# Altium PCB PCB1.PcbDoc
Units mil, origin at the board's own origin, x right, y up, seen from the top; angles counter-clockwise.
Board outline 2000 x 2000 mil, 2 copper layers (Top Layer, Bottom Layer); 67 components, 80 nets, 316 pads, 83 vias.
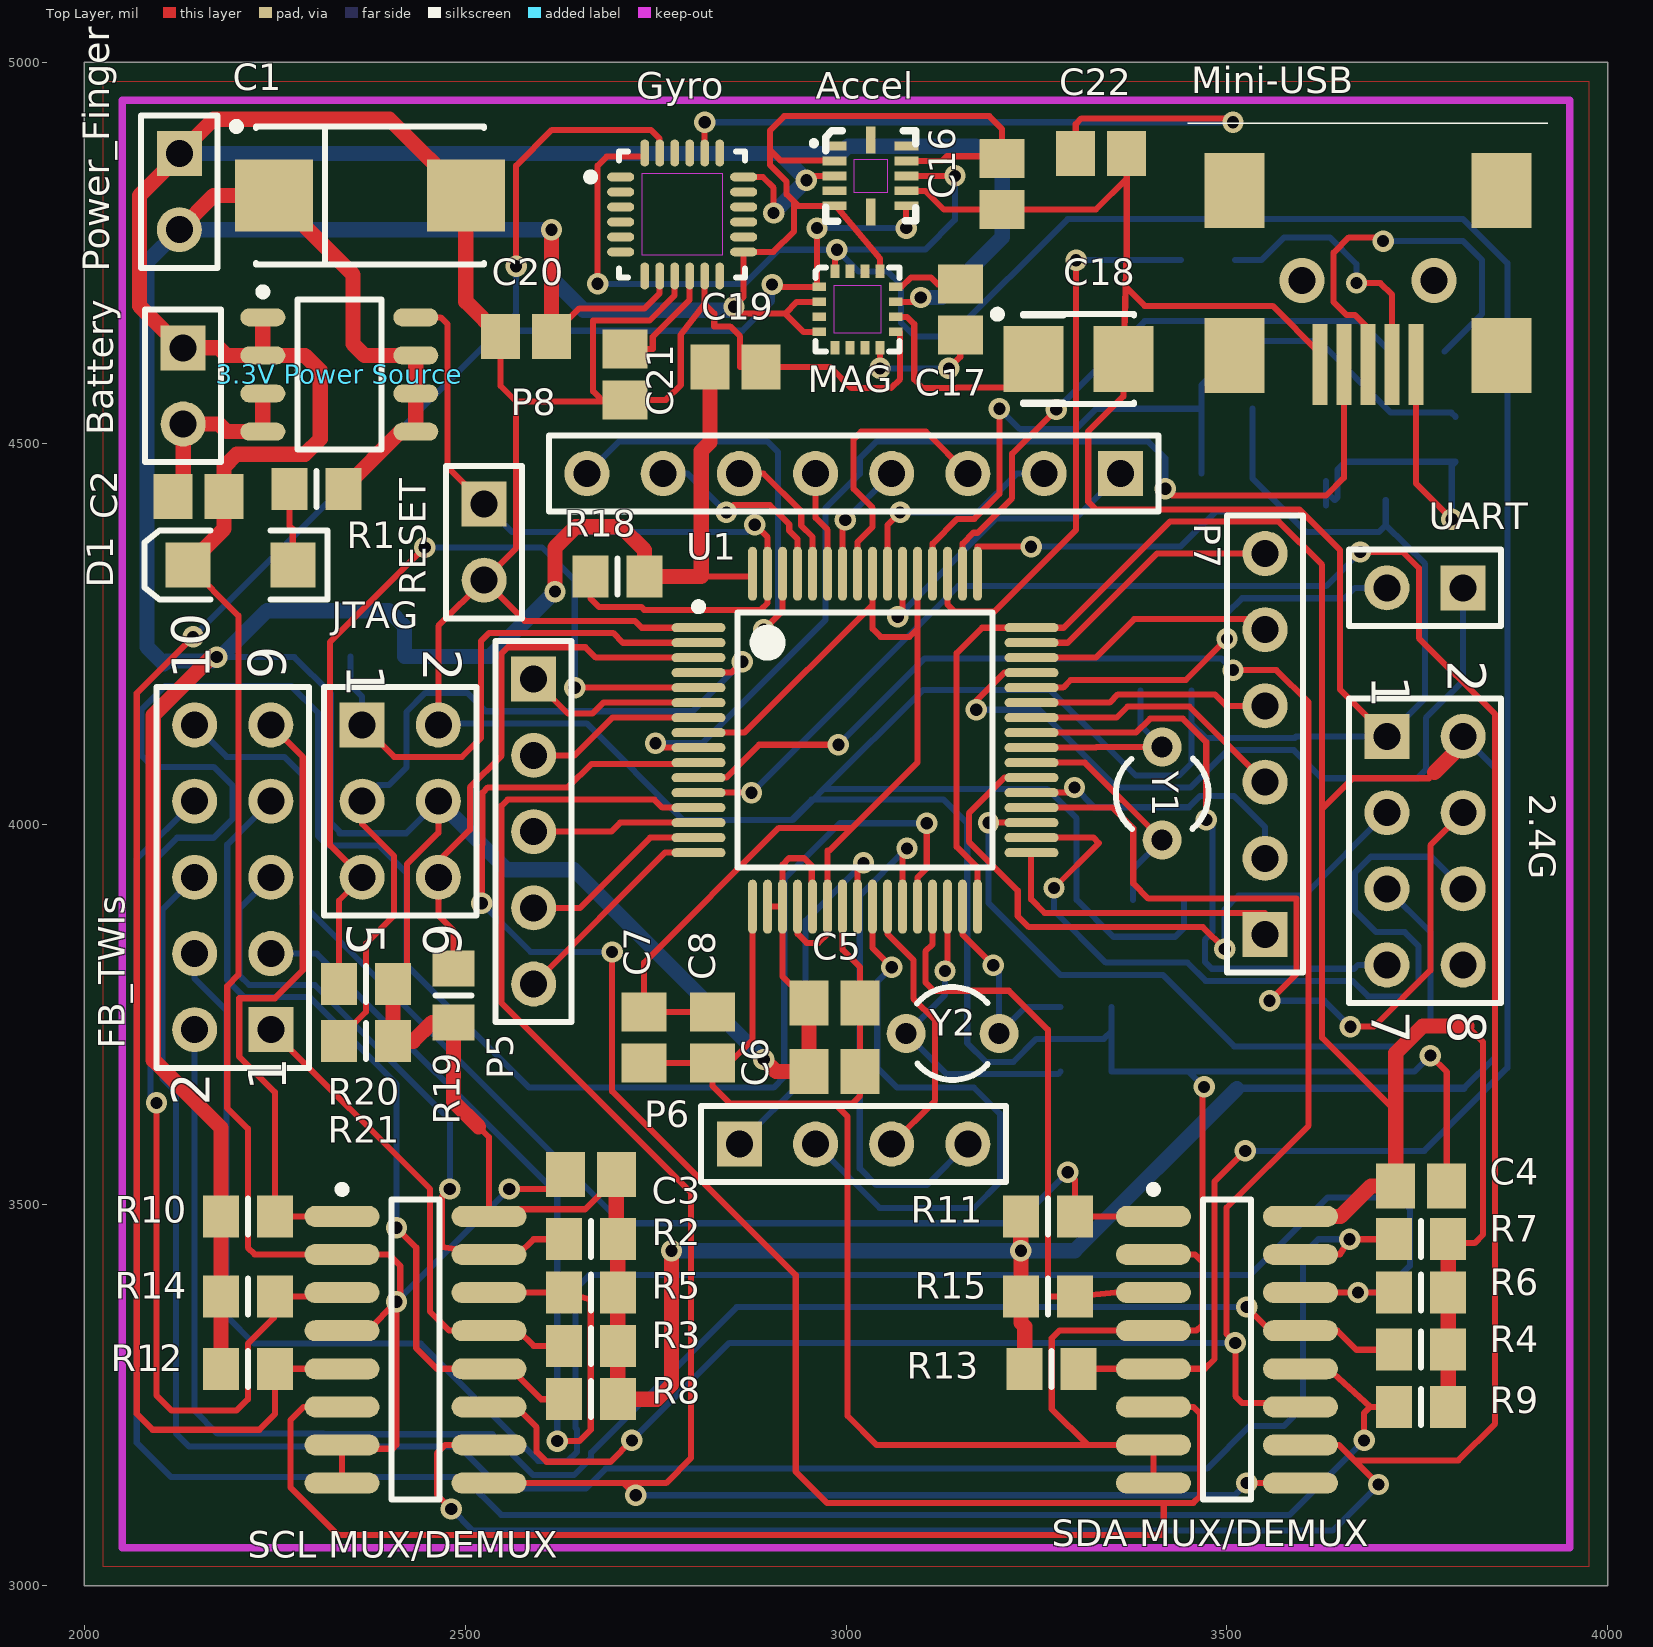
[diagram p0: Top Layer view]
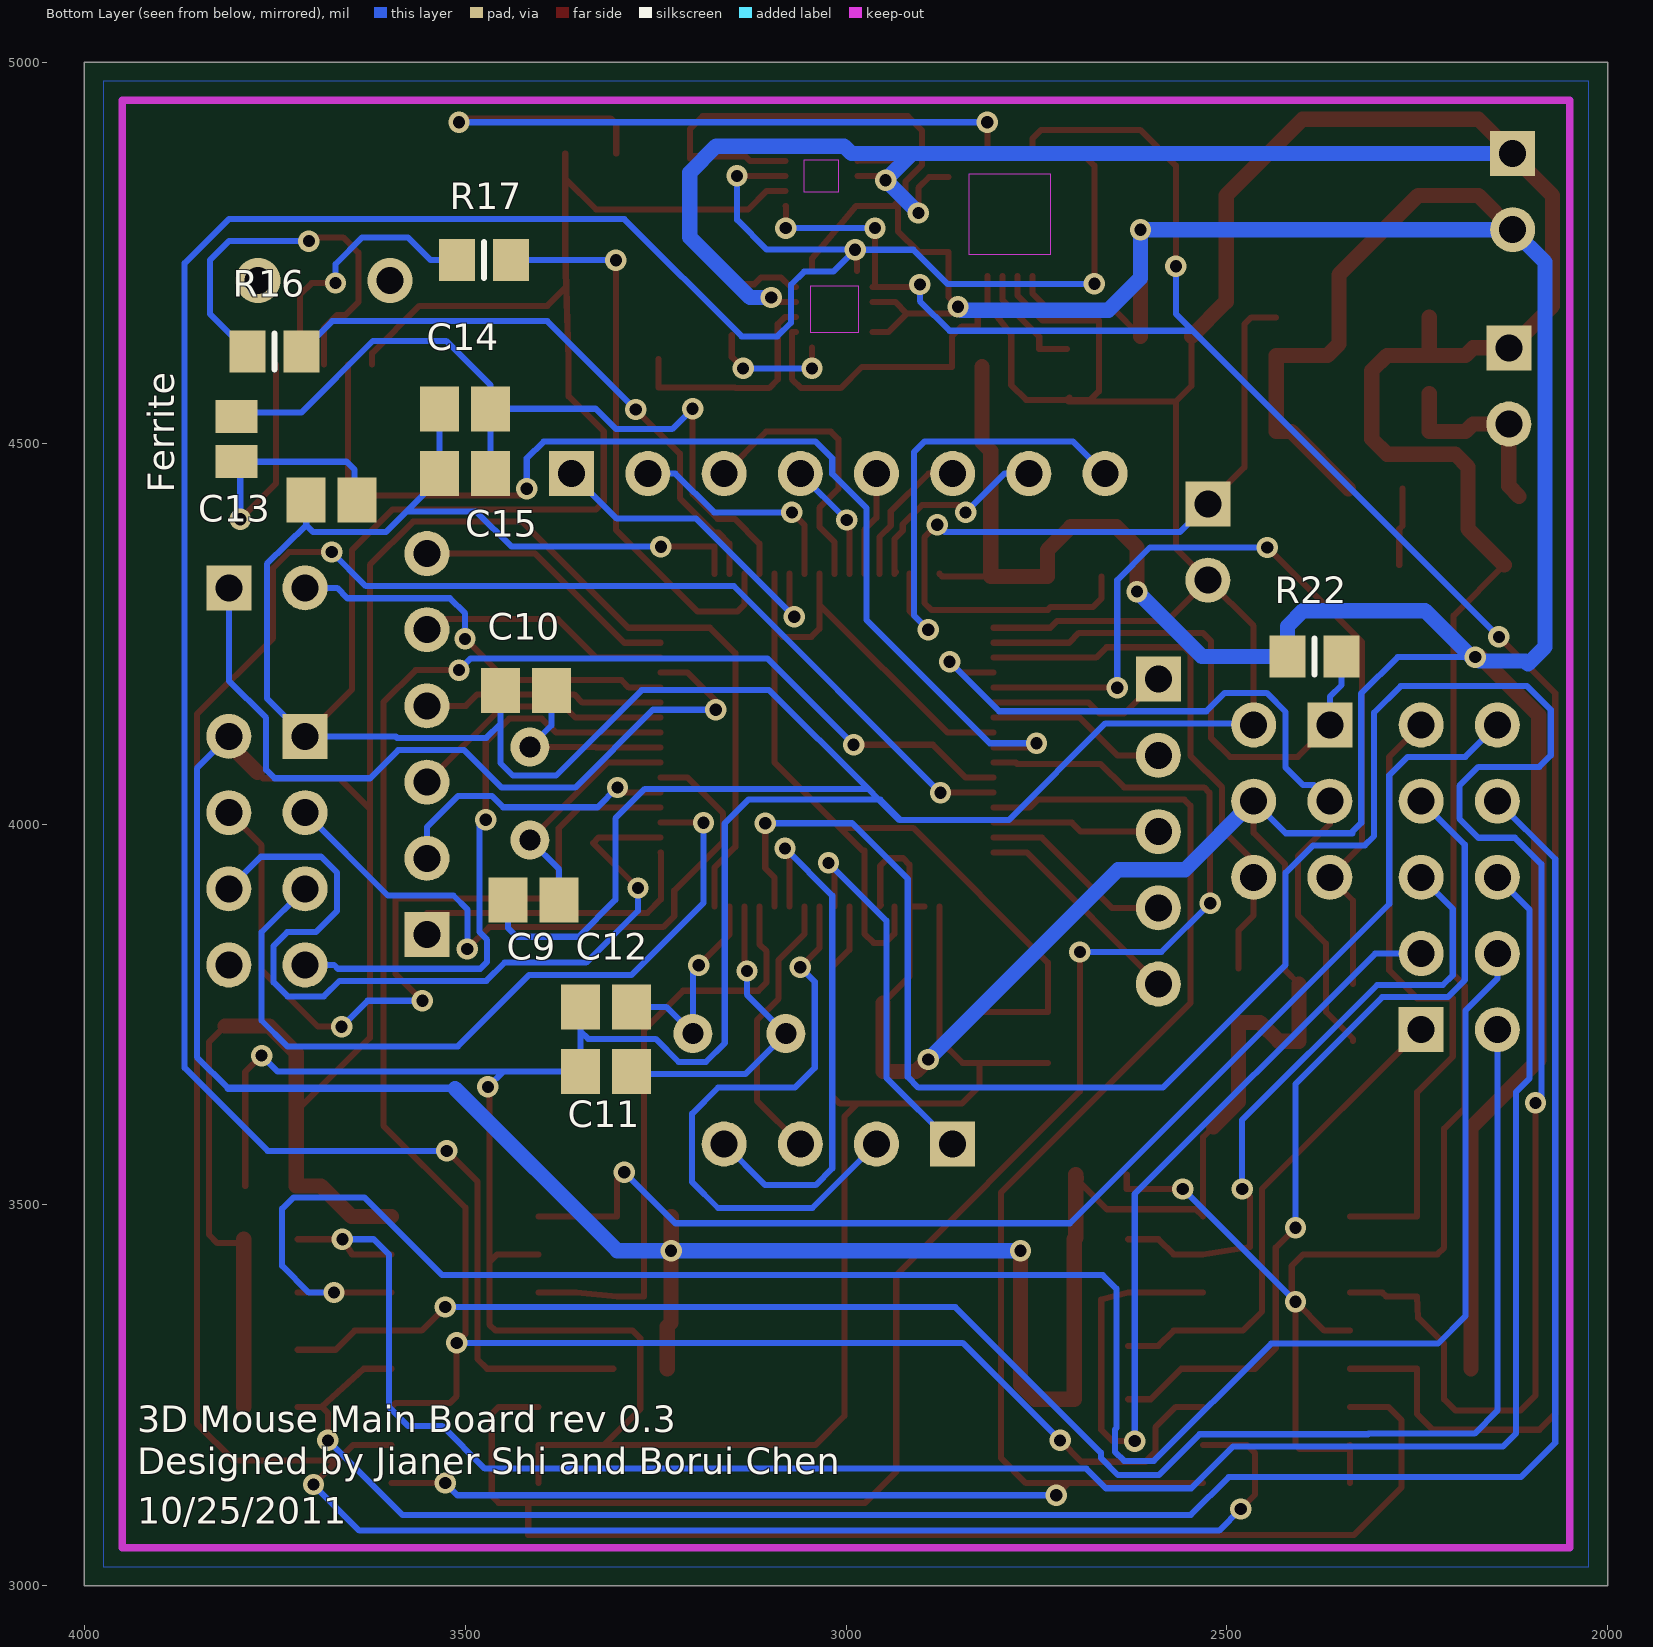
[diagram p1: Bottom Layer view, seen from below]

## Layer stack, top to bottom
Top Layer: signal copper 1.4
Dielectric: dielectric 12.6, FR-4, Dk 4.8
Bottom Layer: signal copper 1.4

## Board outline
2000,3000 4000,3000 4000,5000 2000,5000

## Design rules (kind name [scope] priority, off if disabled: settings)
Clearance "Polygon Spacing" [InPolygon] p1: gap=30
Clearance [All] p2: gap=7.8
HoleSize [All] p1: absolutevalues=TRUE maxlimit=100 minlimit=16 maxpercent=80.000 minpercent=20.000
MinimumAnnularRing [All] p1: minimumring=6
PlaneClearance [All] p1: clearance=8
PolygonConnect [All] p1: connectstyle=Relief reliefconductorwidth=10 reliefentries=4 polygonreliefangle="90 Angle"
RoutingVias [All] p1: holewidth=16 width=28 viastyle="Through Hole" minholewidth=16 minwidth=27 maxholewidth=16 maxwidth=35
SilkscreenOverComponentPads [All] p1: minsilkscreentomaskgap=10
SolderMaskExpansion [All] p1: expansion=8
Width [All] p1: maxlimit=50 minlimit=8 preferedwidth=8
25 further rules are at their usual default settings.

## Classes and differential pairs
net class TWI[1..0]: TWI0 TWI1
net class PB[11..0]: PB0 PB1 PB2 PB3 PB4 PB5 PB6 PB7 PB8 PB9 PB10 PB11
net class PA[31..0]: PA0 PA1 PA2 PA3 PA4 PA8 PA9 PA10 PA11 PA12 PA13 PA14 PA15 PA16 PA17 PA18 PA19 PA20 PA21 PA22 PA23 PA24 PA25 PA26 PA27 PA28 PA29 PA30 PA31
net class INT5_[2..0]: INT5_0 INT5_1 INT5_2
net class BUS_SEL[2..0]: BUS_SEL0 BUS_SEL1 BUS_SEL2
net class AUX_TWI[1..0]: AUX_TWI0 AUX_TWI1
component class "U_Main Board": 2.4G C5 C6 C7 C8 C9 C10 C11 C12 C13 C14 C15 Ferrite JTAG Mini-USB R14 R15 R16 R17 R18 R19 R20 R21 R22 RESET U1 UART Y1 Y2
component class U_IMU3000: C19 C20 C21 C22 Gyro
component class U_I2C_BUS_MUX: C3 C4 FB_TWIs R2 R3 R4 R5 R6 R7 R8 R9 R10 R11 R12 R13 "SCL MUX/DEMUX" "SDA MUX/DEMUX"
component class U_HMC5883L: C17 C18 MAG
component class U_BMA180: Accel C16
component class U_3: "3.3V Power Source" Battery C1 C2 D1 R1
component class 3DMouseMainBoardAssembly: P5 P6 P7 P8 Power_Finger

## Components (designator, comment, footprint, x,y, rotation, side; value= is the part's Value field where it differs from the comment)
2.4G "Header 4X2" HDR2X4 3710,4115 r270 top
"3.3V Power Source" "TPS7333Q" SOIC127P600-8BL 2335,4590 r0 top
Accel "BMA180" "BMA180 - ECESHOP" 2985,4890 r0 top
Battery "Header 2" HDR1X2 2130,4625 r270 top
C1 "Cap Pol1" TC7343-2917 2375,4825 r0 top
C2 "Cap Semi" CAPC2012N 2150,4430 r180 top
C3 "Cap Semi" CAPC2012N 2665,3540 r0 top
C4 "Cap Semi" CAPC2012N 3755,3525 r180 top
C5 "Cap Semi" CAPC2012N 2985,3765 r180 top
C6 "Cap Semi" CAPC2012N 2985,3675 r180 top
C7 "Cap Semi" CAPC2012N 2735,3720 r90 top
C8 "Cap Semi" CAPC2012N 2825,3720 r90 top
C9 "Cap Semi" CAPC2012N 3410,3900 r180 bottom
C10 "Cap Semi" CAPC2012N 3420,4175 r180 bottom
C11 "Cap Semi" CAPC2012N 3315,3675 r180 bottom
C12 "Cap Semi" CAPC2012N 3315,3760 r180 bottom
C13 "Cap Semi" CAPC2012N 3675,4425 r0 bottom
C14 "Cap Semi" CAPC2012N 3500,4545 r0 bottom
C15 "Cap Semi" CAPC2012N 3500,4460 r0 bottom
C16 "Cap Semi" CAPC2012N 3205,4840 r90 top
C17 "Cap Semi" CAPC2012N 3150,4675 r90 top
C18 "Cap Pol1" TC3528-1411 3305,4610 r0 top
C19 "Cap Semi" CAPC2012N 2855,4600 r180 top
C20 "Cap Semi" CAPC2012N 2580,4640 r0 top
C21 "Cap Semi" CAPC2012N 2710,4590 r90 top
C22 "Cap Semi" CAPC2012N 3335,4880 r180 top
D1 "LED2" 3.2X1.6X1.1 2205,4340 r180 top
FB_TWIs "Header 5X2" HDR2X5 2245,3730 r90 top
Ferrite "Ferrite Bead 1A" C0805 3800,4505 r90 bottom
Gyro "IMU3000" IMU3000_ECESHOP 2785,4800 r0 top
JTAG "Header 3X2" HDR2X3 2365,4130 r270 top
MAG "HMC5883L" "HMC5883L - ECESHOP" 2965,4705 r0 top
Mini-USB "Mini USB" "MINI USB" 3685,4920 r270 top
P5 "Header 5" HDR1X5 2590,4190 r270 top
P6 "Header 4" HDR1X4 2860,3580 r0 top
P7 "Header 8" HDR1X6 3550,3855 r90 top
P8 "Header 7" HDR1X8 3360,4460 r180 top
Power_Finger "Header 2" HDR1X2 2125,4880 r270 top
R1 "Res3" RESC2012N 2305,4440 r180 top
R2 "Res3" RESC2012N 2665,3455 r180 top
R3 "Res3" RESC2012N 2665,3315 r180 top
R4 "Res3" RESC2012N 3755,3310 r180 top
R5 "Res3" RESC2012N 2665,3385 r180 top
R6 "Res3" RESC2012N 3755,3385 r180 top
R7 "Res3" RESC2012N 3755,3455 r180 top
R8 "Res3" RESC2012N 2665,3245 r180 top
R9 "Res3" RESC2012N 3755,3235 r180 top
R10 "Res3" RESC2012N 2215,3485 r0 top
R11 "Res3" RESC2012N 3265,3485 r0 top
R12 "Res3" RESC2012N 2215,3285 r0 top
R13 "Res3" RESC2012N 3270,3285 r0 top
R14 "Res3" RESC2012N 2215,3380 r180 top
R15 "Res3" RESC2012N 3265,3380 r180 top
R16 "Res3" RESC2012N 3750,4620 r180 bottom
R17 "Res3" RESC2012N 3475,4740 r180 bottom
R18 "Res3" RESC2012N 2700,4325 r180 top
R19 "Res3" RESC2012N 2485,3775 r90 top
R20 "Res3" RESC2012N 2370,3790 r180 top
R21 "Res3" RESC2012N 2370,3715 r180 top
R22 "Res3" RESC2012N 2385,4220 r180 bottom
RESET "Header 2" HDR1X2 2525,4420 r270 top
"SCL MUX/DEMUX" "74LV4051" SOIC16_M 2435,3310 r0 top
"SDA MUX/DEMUX" "74LV4051" SOIC16_M 3500,3310 r0 top
U1 "AT32UC3B0256-A2UT" TQFP64_N 3025,4110 r0 top
UART "Header 2" HDR1X2 3810,4310 r180 top
Y1 "XTAL 16Mhz" R38 3415,4040 r0 top
Y2 "XTAL 32.768khz" R38 3140,3725 r270 top

## Footprints (in the part's own frame and the unit in brackets; to place one, negate y for a bottom-side part, rotate by r counter-clockwise, add the part's x,y. Pads: shape width x height; smd on the part's side, far side on the other; paste and mask are expansions set on the pad)
3.2X1.6X1.1 [mm] "SMT LED; 2 Flat Leads"
  rect 1.5x1.5 smd: 1(-1.75,0) 2(1.75,0)
  silkscreen extent -2.9,-1.15 3.2,1.15
"BMA180 - ECESHOP" [mm] "BMA180 - ECESHOP"
  rect 0.8x0.29 smd: 1(0,0) 2(0,-0.5) 3(0,-1) 4(0,-1.5) 5(0,-2) 7(2.4,-2) 8(2.4,-1.5) 9(2.4,-1) 10(2.4,-0.5) 11(2.4,0)
  rect 0.32x0.9 smd: 6(1.2,-2.2) 12(1.2,0.2)
  Keep-Out Layer region: 0.633,-1.54 1.773,-1.54 1.773,-0.462 0.633,-0.462
  silkscreen extent -0.73,-2.51 2.7,0.5, body extent -0.3,-2.5 2.7,0.5, height 0.9
C0805 [mm] "Chip Capacitor, Body 2.0x1.3mm, IPC High Density"
  rect 1.1x1.4 smd: 1(-0.75,0) 2(0.75,0)
  body extent -1.1,-0.72 1.1,0.72, height 1.4
CAPC2012N [mm] "Chip Capacitor, Body 2.0x1.3mm, IPC Medium Density"
  rect 1.3x1.5 smd: 1(-0.85,0) 2(0.85,0)
  body extent -1.1,-0.72 1.1,0.72, height 1.1
HDR1X2 [mm] "Connector; Header; 2 Position"
  rect 1.5x1.5 hole 0.9: 1(0,0)
  round 1.5 hole 0.9: 2(2.54,0)
  silkscreen extent -1.27,-1.27 3.81,1.27
HDR1X4 [mm] "Connector; Header; 4 Position"
  rect 1.5x1.5 hole 0.9: 1(0,0)
  round 1.5 hole 0.9: 2(2.54,0) 3(5.08,0) 4(7.62,0)
  silkscreen extent -1.27,-1.27 8.89,1.27
HDR1X5 [mm] "Connector; Header; 5 Position"
  rect 1.5x1.5 hole 0.9: 1(0,0)
  round 1.5 hole 0.9: 2(2.54,0) 3(5.08,0) 4(7.62,0) 5(10.16,0)
  silkscreen extent -1.27,-1.27 11.43,1.27
HDR1X6 [mm] "Connector; Header; 6 Position"
  rect 1.5x1.5 hole 0.9: 1(0,0)
  round 1.5 hole 0.9: 2(2.54,0) 3(5.08,0) 4(7.62,0) 5(10.16,0) 6(12.7,0)
  silkscreen extent -1.27,-1.27 13.97,1.27
HDR1X8 [mm] "Connector; Header; 8 Position"
  rect 1.5x1.5 hole 0.9: 1(0,0)
  round 1.5 hole 0.9: 2(2.54,0) 3(5.08,0) 4(7.62,0) 5(10.16,0) 6(12.7,0) 7(15.24,0) 8(17.78,0)
  silkscreen extent -1.27,-1.27 19.05,1.27
HDR2X3 [mm] "Connector; Header; 3x2 Position"
  rect 1.5x1.5 hole 0.9: 1(0,0)
  round 1.5 hole 0.9: 2(0,2.54) 3(2.54,0) 4(2.54,2.54) 5(5.08,0) 6(5.08,2.54)
  silkscreen extent -1.27,-1.27 6.35,3.81
HDR2X4 [mm] "Connector; Header; 4x2 Position"
  rect 1.5x1.5 hole 0.9: 1(0,0)
  round 1.5 hole 0.9: 2(0,2.54) 3(2.54,0) 4(2.54,2.54) 5(5.08,0) 6(5.08,2.54) 7(7.62,0) 8(7.62,2.54)
  silkscreen extent -1.27,-1.27 8.89,3.81
HDR2X5 [mm] "Connector; Header; 5x2 Position"
  rect 1.5x1.5 hole 0.9: 1(0,0)
  round 1.5 hole 0.9: 2(0,2.54) 3(2.54,0) 4(2.54,2.54) 5(5.08,0) 6(5.08,2.54) 7(7.62,0) 8(7.62,2.54) 9(10.16,0) 10(10.16,2.54)
  silkscreen extent -1.27,-1.27 11.43,3.81
"HMC5883L - ECESHOP" [mm]
  rect 0.45x0.29 smd: 1(0,0) 2(0,-0.5) 3(0,-1) 4(0,-1.5) 9(2.55,-1.5) 10(2.55,-1) 11(2.55,-0.5) 12(2.55,0)
  rect 0.29x0.45 smd: 5(0.525,-2.025) 6(1.025,-2.025) 7(1.525,-2.025) 8(2.025,-2.025) 13(2.025,0.525) 14(1.525,0.525) 15(1.025,0.525) 16(0.525,0.525)
  Keep-Out Layer region: 0.473,-1.532 2.071,-1.532 2.071,0.045 0.473,0.045
  silkscreen extent -0.13,-2.15 2.67,0.65
IMU3000_ECESHOP [mm] "IMU3000_ECESHOP"
  oval 0.9x0.295 smd: 1(-2.05,1.25) 2(-2.05,0.75) 3(-2.05,0.25) 4(-2.05,-0.25) 5(-2.05,-0.75) 6(-2.05,-1.25) 13(2.05,-1.25) 14(2.05,-0.75) 15(2.05,-0.25) 16(2.05,0.25) 17(2.05,0.75) 18(2.05,1.25)
  oval 0.295x0.9 smd: 7(-1.25,-2.05) 8(-0.75,-2.05) 9(-0.25,-2.05) 10(0.25,-2.05) 11(0.75,-2.05) 12(1.25,-2.05) 19(1.25,2.05) 20(0.75,2.05) 21(0.25,2.05) 22(-0.25,2.05) 23(-0.75,2.05) 24(-1.25,2.05)
  Keep-Out Layer region: -1.35,-1.345 1.352,-1.345 1.352,1.352 -1.35,1.352
  silkscreen extent -3.17,-2.1 2.1,2.1, body extent -2.07,-2.07 2.07,2.07, height 1
"MINI USB" [mm] "Digikey http://search.digikey.com/us/en/products/1734035-2/A31727CT-ND/773789"
  rect 2.7x0.5 smd: 1(8.05,1.6) 2(8.05,0.8) 3(8.05,0) 4(8.05,-0.8) 5(8.05,-1.6)
  rect 2.5x2 smd: NC(2.25,4.45) NC(2.25,-4.45) NC(7.75,4.45) NC(7.75,-4.45)
  silkscreen extent 0,-6 0,6
R38 [mm] "Crystal, Thru-Hole; 2 Leads; Body 3.1 x 8.2 mm (Dia.xH)"
  round 1.3 hole 0.7: 1(0,1.55) 2(0,-1.55)
  silkscreen extent -1.55,-1.19 1.55,1.17
RESC2012N [mm] "Chip Resistor, Body 2.0x1.3mm, IPC Medium Density"
  rect 1.2x1.4 smd: 1(-0.9,0) 2(0.9,0)
  silkscreen extent 0,-0.6 0,0.6, body extent -1.07,-0.7 1.07,0.7, height 0.65
SOIC16_M [mm] "SOIC, 16-Leads, Body 9.9x3.9mm, Pitch 1.27mm, IPC Low Density"
  oval 2.5x0.7 smd: 1(-2.45,4.445) 2(-2.45,3.175) 3(-2.45,1.905) 4(-2.45,0.635) 5(-2.45,-0.635) 6(-2.45,-1.905) 7(-2.45,-3.175) 8(-2.45,-4.445) 9(2.45,-4.445) 10(2.45,-3.175) 11(2.45,-1.905) 12(2.45,-0.635) 13(2.45,0.635) 14(2.45,1.905) 15(2.45,3.175) 16(2.45,4.445)
  silkscreen extent -2.57,-5 0.8,5.47, body extent -2,-5 2,5, height 1.91
SOIC127P600-8BL [mm] "SOIC, 8-Leads, Body 4.9x3.9mm, Pitch 1.27mm, IPC High Density"
  oval 1.5x0.6 smd: 1(-2.55,1.905) 2(-2.55,0.635) 3(-2.55,-0.635) 4(-2.55,-1.905) 5(2.55,-1.905) 6(2.55,-0.635) 7(2.55,0.635) 8(2.55,1.905)
  silkscreen extent -2.67,-2.5 1.4,2.88, body extent -2,-2.5 2,2.5, height 2.59
TC3528-1411 [mm] "Capacitor, SM Tantalum; Body 3.5 x 2.8 mm (LxW typ)"
  rect 2x2.2 smd: 1(-1.5,0) 2(1.5,0)
  silkscreen extent -2.82,-1.5 1.85,1.62
TC7343-2917 [mm] "Capacitor, SM Tantalum; Body 7.3 x 4.3 mm (LxW typ)"
  rect 2.6x2.4 smd: 1(-3.2,0) 2(3.2,0)
  silkscreen extent -4.57,-2.3 3.8,2.42
TQFP64_N [mm] "Thin QFP, 64-Leads, Body 10x10mm, Pitch 0.5mm, IPC Medium Density"
  oval 1.8x0.3 smd: 1(-5.55,3.75) 2(-5.55,3.25) 3(-5.55,2.75) 4(-5.55,2.25) 5(-5.55,1.75) 6(-5.55,1.25) 7(-5.55,0.75) 8(-5.55,0.25) 9(-5.55,-0.25) 10(-5.55,-0.75) 11(-5.55,-1.25) 12(-5.55,-1.75) 13(-5.55,-2.25) 14(-5.55,-2.75) 15(-5.55,-3.25) 16(-5.55,-3.75) 33(5.55,-3.75) 34(5.55,-3.25) 35(5.55,-2.75) 36(5.55,-2.25) 37(5.55,-1.75) 38(5.55,-1.25) 39(5.55,-0.75) 40(5.55,-0.25) 41(5.55,0.25) 42(5.55,0.75) 43(5.55,1.25) 44(5.55,1.75) 45(5.55,2.25) 46(5.55,2.75) 47(5.55,3.25) 48(5.55,3.75)
  oval 0.3x1.8 smd: 17(-3.75,-5.55) 18(-3.25,-5.55) 19(-2.75,-5.55) 20(-2.25,-5.55) 21(-1.75,-5.55) 22(-1.25,-5.55) 23(-0.75,-5.55) 24(-0.25,-5.55) 25(0.25,-5.55) 26(0.75,-5.55) 27(1.25,-5.55) 28(1.75,-5.55) 29(2.25,-5.55) 30(2.75,-5.55) 31(3.25,-5.55) 32(3.75,-5.55) 49(3.75,5.55) 50(3.25,5.55) 51(2.75,5.55) 52(2.25,5.55) 53(1.75,5.55) 54(1.25,5.55) 55(0.75,5.55) 56(0.25,5.55) 57(-0.25,5.55) 58(-0.75,5.55) 59(-1.25,5.55) 60(-1.75,5.55) 61(-2.25,5.55) 62(-2.75,5.55) 63(-3.25,5.55) 64(-3.75,5.55)
  silkscreen extent -5.67,-4.25 4.25,4.57, body extent -5,-5 5,5, height 1.2

## Part data
2.4G: "Header, 4-Pin, Dual row"
Battery Power_Finger RESET UART: "Header, 2-Pin"
C1 C18: "Polarized Capacitor (Radial)"
C2 C3 C4 C5 C6 C7 C8 C9 C10 C11 C12 C13 C14 C15 C16 C17 C19 C20 C21 C22: "Capacitor (Semiconductor SIM Model)"
D1: "Typical RED, GREEN, YELLOW, AMBER GaAs LED"
FB_TWIs: "Header, 5-Pin, Dual row"
Ferrite: library part "Ferrite Bead"
JTAG: "Header, 3-Pin, Dual row"
P5: "Header, 5-Pin"
P6: "Header, 4-Pin"
P7: library part "Header 6", "Header, 6-Pin"
P8: library part "Header 8", "Header, 8-Pin"
R1 R2 R3 R4 R5 R6 R7 R8 R9 R10 R11 R12 R13 R14 R15 R16 R17 R18 R19 R20 R21 R22: "Resistor"
U1: "32-bit AVR UC3 B Series Microcontroller, 256KB Flash, 32KB SRAM, 44 GPIO pins, Industrial Grade, 64-Pin TQFP, Tray"
Y1 Y2: library part XTAL, "Crystal Oscillator"

## Via types
v1: diameter 28, hole 16, Top Layer to Bottom Layer, 81 vias
v2: diameter 59.06, hole 35.43, Top Layer to Bottom Layer, 2 vias

## Nets (pads, with @x,y where several pads share a name; then routed paths per layer and width w, separated by ;. In a path a pad name is that pad's centre, name@x,y a point inside that pad or via, vN(x,y) a via of type N, cw(c..) or ccw(c..) an arc to the next point about the centre after c; other vN are vias at no path point)
3.3VCC: 2.4G.2 "3.3V Power Source.5" "3.3V Power Source.6" "3.3V Power Source.7" "SCL MUX/DEMUX.16" "SDA MUX/DEMUX.16" Accel.2 Accel.5 Accel.10 C1.1 C3.2 C4.2 C5.2 C6.2 C16.2 C19.2 C20.2 Gyro.8 Gyro.13 JTAG.4 MAG.2 MAG.4 MAG.13 Power_Finger.2 R1.1 R2.1 R3.1 R4.1 R5.1 R6.1 R7.1 R8.1 R9.1 R10.1 R11.1 R12.1 R13.1 R14.2 R15.2 R18.1 R19.1 R20.1 R21.1 R22.1 U1.18 U1.19 U1.21 U1.32 U1.48 U1.64 | length 13690.2
  Top Layer w8: R20.1 2423.67,3808.24 2423.67,3947.12 2465,3988.45 JTAG.4 ; 2517.73,3602.73 2531.46,3589 2531.46,3485 2540.82,3494.36 2657.7,3494.36 2697.75,3534.41 2698.46,3535.12 C3.2 ; C20.2 2650.12,4676.66 2735.66,4676.66 2755.47,4696.47 Gyro.8 ; 2810,4325 2873.86,4325 U1.64 ; U1.18 U1.19 ; U1.19@2918.71,3893.48 U1.19 ; C5.2 2916.73,3799.8 U1.19 ; U1.21 2954.12,3893.47 2955,3894.35 2955,3945 2945,3955 2925,3955 2916.73,3946.73 2916.73,3920 U1.19 ; MAG.4 2944.05,4645.95 2920,4670 ; MAG.2 2935.32,4685.32 2920,4670 ; Accel.2 2984.52,4870.8 2914.2,4870.8 2900,4885 ; MAG.13 3044.72,4742.28 2987,4811.26 Accel.5 2937.16,4811.26 2931.8,4816.62 ; Accel.10 3126.2,4870.32 3132.31,4876.43 3202.03,4876.43 C16.2 3205,4912 3188,4929 2919,4929 2900,4910 2900,4885 ; U1.32 3172.64,3942.57 3145.2,3970.01 3145.2,4224.2 3178.64,4257.64 U1.48 3285.64,4257.64 3425,4397 3568,4397 3625,4340 3625,4020 ; 3721.54,3622.86 3625,3719.4 3625,4020 ; 3772.5,4067.5 3765,4060 3665,4060 3625,4020 ; R7.1 3795.43,3450 3825,3450 3836.2,3461.2 3836.2,3713.8 3815,3735 ; 2900,4885 2900,4865 2922,4843 2922,4826.42 2931.8,4816.62 ; 2920,4670 2862,4670 v1(2853,4679) 2865.71,4691.71 Gyro.13 2904.79,4750.79 2931.8,4777.8 2931.8,4816.62
  Top Layer w20: Power_Finger.2 2170,4825 C1.1 2353,4721.02 2353,4630 2368,4615 2435.39,4615 2435.39,4565 2435.39,4515 2415.43,4515 R1.1 ; v1(2174,4219) 2167.07,4219 2090.87,4142.8 2090.87,3690 2179.57,3601.3 R10.1 2179.57,3432 R14.2 2179.57,3332 R12.1 ; R20.1 R21.1 2432,3715 2456.57,3739.57 R19.1 2485,3635.46 2517.73,3602.73 ; C20.2 v1(2613.46,4780) ; v1(2618,4305) 2618,4363 2645,4390 2705,4390 2735.43,4359.57 R18.1 2810,4325 2810,4489.46 2821.54,4501 C19.2 ; C3.2@2697.75,3534.41 C3.2 ; C3.2@2698.46,3535.12 2698.46,3456.97 R2.1 R5.1 R3.1 R8.1 2752,3245 2771,3264 v1(2771,3440) ; v1(2892,3691) 2908,3675 C6.2 C5.2 ; v1(3229.57,3440) R11.1 3229,3485 3229,3446 3229.57,3445.43 R15.2 3229.57,3345.43 3234.57,3340.43 R13.1 ; 3596.46,3485 3649,3485 3689,3525 C4.2 3721.54,3622.86 3721.54,3699.54 3757,3735 3815,3735 ; 3772.5,4067.5 3810,4105 2.4G.2 ; R9.1 R4.1 R6.1 R7.1
  Bottom Layer w8: v1(2174,4219) 2179,4219 2276,4219 2323.67,4171.33 2323.67,4001.55 2335,3990.23 2335,3987.8 2422.8,3987.8 JTAG.4 ; v1@2848.41,4674.41 v1(2853,4679) ; 2.4G.2 3852,4073 3852,3694 3811,3653
  Bottom Layer w10: 3513.2,3653 3811,3653
  Bottom Layer w20: v1(2174,4219) 2168.79,4213.79 2108.79,4213.79 2105,4210 2082.67,4232.33 2082.67,4737.67 Power_Finger.2 v1(2613.46,4780) 2613.46,4716.37 2655.41,4674.41 v1@2848.41,4674.41 ; v1@2179,4219 2240,4280 2400,4280 2420.43,4259.57 R22.1 2533,4220 v1(2618,4305) ; JTAG.4 2555,3940 2643,3940 v1(2892,3691) ; v1(2771,3440) v1(3229.57,3440) 3300.2,3440 3513.2,3653
AUX_TWI0: Gyro.7
AUX_TWI1: Gyro.6
BUS_SEL0: "SCL MUX/DEMUX.11" "SDA MUX/DEMUX.11" U1.11 | length 3033.1
  Top Layer w8: 2531.46,3235 2567,3235 2594,3208 2594,3176 2607,3163 2691,3163 v1(2719,3191) ; U1.11 2842.79,4060.79 2886,4104 v1(2990,4104) ; v1(3508,4202) 3565,4202 3607.13,4159.87 3607.13,3604.13 3499.64,3496.64 3499.64,3330.36 v1(3511,3319) 3511,3249 3520,3240 3591.46,3240 3596.46,3235
  Bottom Layer w8: v1(2719,3191) 2847,3319 v1(3511,3319) ; v1(2990,4104) 3103,4217 3493,4217 v1(3508,4202)
BUS_SEL1: "SCL MUX/DEMUX.10" "SDA MUX/DEMUX.10" U1.12 | length 3985.8
  Top Layer w8: v1(2482,3101) 2463.04,3119.96 2463.04,3174.04 2474,3185 2531.46,3185 ; U1.12 v1(2876,4041.1) ; 3596.46,3185 3647,3185 3667.36,3164.64 ; v1(3675,4357) 3731,4357 3752,4336 3752,4244 3852,4144 3852,3213 3803.64,3164.64 3667.36,3164.64 ; v1(3699,3133) 3667.36,3164.64
  Bottom Layer w8: v1(2482,3101) 2510.38,3072.62 3638.62,3072.62 v1(3699,3133) ; v1(2876,4041.1) 3147.03,4312.13 3630.13,4312.13 v1(3675,4357)
BUS_SEL2: "SCL MUX/DEMUX.9" "SDA MUX/DEMUX.9" U1.13 | length 2406
  Top Layer w8: 2531.46,3135 2708,3135 ; v1(2724,3119) 2708,3135 ; U1.13 2759,4021.42 2748.42,4032 2556,4032 2548,4024 2548,3765 2796.8,3516.2 2796.8,3168 2763.8,3135 2708,3135 ; v1(3526,3135) 3596.46,3135
  Bottom Layer w8: v1(2724,3119) 3510,3119 v1(3526,3135)
GND: 2.4G.1 "3.3V Power Source.1" "3.3V Power Source.2" "SCL MUX/DEMUX.2" "SCL MUX/DEMUX.4" "SCL MUX/DEMUX.7" "SCL MUX/DEMUX.8" "SDA MUX/DEMUX.2" "SDA MUX/DEMUX.4" "SDA MUX/DEMUX.7" "SDA MUX/DEMUX.8" Accel.3 Accel.8 Battery.1 C1.2 C2.1 C3.1 C4.1 C5.1 C6.1 C7.1 C8.1 C9.1 C10.1 C11.1 C12.1 C13.2 C14.2 C15.2 C16.1 C18.2 C19.1 C20.1 C21.1 C22.1 D1.2 Gyro.9 Gyro.11 Gyro.18 JTAG.2 MAG.9 MAG.11 Mini-USB.5 Power_Finger.1 RESET.2 U1.1 U1.17 U1.23 U1.49 | length 15956.9
  Top Layer w8: D1.2 2202.6,4273.5 2202.6,3801.86 2187.87,3787.13 2187.87,3627.13 2215,3600 2215,3444 2224,3435 2338.54,3435 2400,3435 2415,3420 2415,3378 v1(2410,3373) ; 2338.54,3135 2338.54,3185 2343.54,3180 2405,3180 2410,3185 v1(2410,3373) ; 2338.54,3335 2372,3335 v1(2410,3373) ; JTAG.2 2465,4260 RESET.2 ; C20.1 2546.54,4575 2567,4554.54 ; v1(2558,3521) 2631.54,3521 C3.1 ; C21.1@2706.54,4560 C21.1 ; C7.1 C8.1 ; Gyro.9 2775.16,4693.81 2742.2,4660.86 2668,4660.86 2668,4568 2679.46,4556.54 C21.1 ; U1.1 2731.93,4257.64 2722.97,4266.6 2578.4,4266.6 RESET.2 ; Gyro.11 2814.53,4682.47 ; Gyro.18 2890.79,4849.21 2905,4835 v1(2905,4802) ; U1.17 2877.36,3716.8 2847.1,3686.54 C8.1 ; v1(2948,4845) 2953.63,4850.63 Accel.3 ; U1.23 2995.47,3835 3018.46,3812.01 C5.1 C6.1 3018.46,3643.46 3008,3633 2985,3633 ; MAG.9 3071,4645.95 3071,4584 3059,4572 3007,4572 2979,4600 C19.1 2861,4600 2861,4640 2847.8,4653.2 2827.06,4653.2 2827.06,4669.94 2814.53,4682.47 ; MAG.11 3092.32,4685.32 v1(3098,4691) ; Accel.8 3104.05,4830.95 3128.46,4806.54 C16.1 3328,4806.54 3368.46,4847 ; U1.49 3172.64,4364 v1(3243,4364) ; C22.1 3368.46,4847 ; 3403.54,3135 3403.54,3185 3317,3185 ; 3403.54,3435 3458,3435 3468.04,3424.96 ; v1(3470,3655) 3468.04,3653.04 3468.04,3424.96 ; Mini-USB.5 3622.01,4617.99 3560,4680 3392.13,4680 3367.13,4705 ; 2.4G.1 3648.26,4176.74 3648.26,4359.74 3595,4413 3328,4413 3318,4423 3318,4515.29 3364.06,4561.34 C18.2 3367.13,4705 ; v1(3767,3696) 3788.46,3674.54 C4.1 ; RESET.2 2567,4362 2567,4554.54 ; 2567,4554.54 2708,4554.54 C21.1 ; C21.1 2763.54,4556.54 2783.06,4576.06 2783.06,4641.78 2814.53,4682.47 ; C8.1 2825,3656 2848,3633 2985,3633 ; 2985,3633 3002,3616 3002,3223 3040,3185 3317,3185 ; 3317,3185 3270,3232 3270,3325 3280,3335 3403.54,3335 3460,3335 3468.04,3343.04 3468.04,3424.96 ; 3367.13,4705 3368.46,4746.41 3368.46,4847
  Top Layer w20: D1.2 2183.46,4387.36 C2.1 2183.46,4468.46 2200.36,4485.36 2290,4485.36 2310,4505.36 2310,4595 2290,4615 2234.61,4615 ; 2234.61,4665 2234.61,4615 ; C20.1 2500.98,4685.55 C1.2 2400.98,4925 2170,4925 Power_Finger.1 2125,4877.2 2072.8,4825 2072.8,4680 2127.8,4625 Battery.1 2177,4625 2187,4615 2234.61,4615
  Bottom Layer w8: Power_Finger.1 Power_Finger.1@2128.61,4883.61 ; v1(2410,3373) v1(2558,3521) ; JTAG.2 2467,4132 2659.44,4132 2786.44,4005 2928,4005 ; v1(3243,4364) 3439,4364 3485,4410 3577,4410 ; C12.1 3348.46,3728 ; C9.1 3443.46,3863.46 3432,3852 3351,3852 3302.7,3900.3 3302.7,4007.3 3264,4046 2971,4046 ; C10.1 3453.46,4131.54 ; v1(3470,3655) 3450,3675 ; C14.2 C15.2 3533.46,4453.54 3577,4410 ; C13.2 3708.46,4392 ; v1(3767,3696) 3746,3675 3450,3675 ; 2928,4005 2955,4032 2957,4032 ; 2928,4005 2930,4005 2957,4032 ; 2957,4032 2971,4046 ; 2957,4032 3128,4032 3159.15,4000.85 3159.15,3712.46 3184,3687.61 3219.61,3687.61 3250,3718 3338.46,3718 3348.46,3728 ; 2971,4046 3100.8,4175.8 3268.2,4175.8 3380.37,4063.63 3437.1,4063.63 3453.46,4080 3453.46,4131.54 ; 3348.46,3728 C11.1 3450,3675 ; 3453.46,4131.54 3472,4113 3589,4113 3591,4115 2.4G.1 3760,4165 3760,4341.46 3708.46,4392 ; 3577,4410 3604,4383 3699.46,4383 3708.46,4392
  Bottom Layer w20: Power_Finger.1 2913,4880 ; v1(2905,4802) v1(2948,4845) 2913,4880 ; v1(3098,4691) 3126,4691 3205,4770 3205,4855 3170.39,4889.61 3002.55,4889.61 2992.94,4880 2913,4880
INT5_0: Gyro.12
INT5_1: Accel.4
INT5_2: MAG.15
IRQ: 2.4G.8
JTAG_TCK: JTAG.1 R22.2 U1.2 | length 702.5
  Top Layer w8: JTAG.1 2407,4088 2496,4088 2520.82,4112.82 2520.82,4240 2531.62,4250.8 2694.32,4250.8 2707.17,4237.95 U1.2
  Bottom Layer w8: R22.2 2349.57,4182.43 2365,4167 JTAG.1
NetC7_2: C7.2 C8.2 U1.8 U1.20 U1.22 U1.53 U1.56 | length 1546.7
  Top Layer w8: U1.8 2866.68,4119.84 3034.84,4288 ; C8.2 C7.2 2735,3818 2912,3995 3008,3995 ; U1.20 2936.42,3856 2948.42,3844 2963.79,3844 2975.79,3856 U1.22 2975.79,3965 2978,3965 3008,3995 ; U1.56 3034.84,4288 ; U1.53 3093.9,4256 ; 3008,3995 3093.9,4080.9 3093.9,4256 ; 3034.84,4288 3034.84,4256 3045.37,4245.47 3083.37,4245.47 3093.9,4256
NetC13_1: C13.1 Ferrite.1 Mini-USB.1 | length 549.2
  Top Layer w8: Mini-USB.1 3747.99,4447.01 v1(3795,4400)
  Bottom Layer w8: C13.1@3630,4418 C13.1@3630,4436.54 ; C13.1@3630,4450 C13.1@3630,4436.54 ; v1(3795,4400) 3795,4470.47 Ferrite.1 3655.47,4475.47 3645,4465 3645,4428.46 C13.1 C13.1@3630,4436.54
NetC17_1: C17.1 MAG.8 | length 167.3
  Top Layer w8: v1(3044.72,4598) MAG.8 ; v1(3135,4598) 3150,4613 C17.1
  Bottom Layer w8: v1(3044.72,4598) v1(3135,4598)
NetC17_2: C17.2 MAG.12 | length 93.3
  Top Layer w8: MAG.12 3072.87,4705 3085.1,4717.23 3111.7,4717.23 3120.46,4708.46 C17.2
NetC18_1: C18.1 MAG.10 | length 299
  Top Layer w8: MAG.10 3080,4665.63 3089.57,4656.06 3089.57,4583.43 3100.8,4572.2 3144.86,4572.2 3145.8,4573.14 3245.94,4573.14 C18.1
NetC21_2: C21.2 Gyro.10 | length 152.3
  Top Layer w8: C21.2 2746.34,4623.46 2746.34,4639.5 2794.84,4688 Gyro.10
NetC22_2: C22.2 Gyro.20 | length 983.9
  Top Layer w8: Gyro.20 v1(2814.53,4921) ; C22.2 3301.54,4918.54 3309,4926 3503,4926 v1(3508,4921)
  Bottom Layer w8: v1(2814.53,4921) v1(3508,4921)
NetD1_1: D1.1 R1.2 | length 101.8
  Top Layer w8: R1.2 2269.57,4391.33 2273.9,4387 D1.1
NetR16_2: R16.2 U1.50 | length 772.8
  Top Layer w8: U1.50 3152.95,4368 3167.24,4382.29 3172.64,4382.29 3218,4427.65 3218,4486 v1(3276,4544)
  Bottom Layer w8: v1(3276,4544) 3392,4660 3674.57,4660 R16.2
NetR17_2: R17.2 U1.51 | length 748.9
  Top Layer w8: U1.51 3133.27,4288 3142.27,4279 3195,4279 3302,4386 v1(3302,4740)
  Bottom Layer w8: v1(3302,4740) R17.2
PA0: JTAG.6 R19.2 U1.3 | length 723.7
  Top Layer w8: R19.2 2485,3860 2465,3880 JTAG.6 2465,3951 2506.33,3992.33 2506.33,4048 2548,4089.67 2548,4224 2556,4232 2658,4232 2671.73,4218.27 U1.3
PA1: JTAG.3 R21.2 U1.4 | length 1063.3
  Top Layer w8: R21.2 2334.57,3718 2370,3753.43 2370,3843 2407,3880 2407,3958 2365,4000 JTAG.3 ; U1.4 2849.58,4198.58 v1(2864,4213)
  Bottom Layer w8: JTAG.3 2386,4051 2400,4051 2423,4074 2423,4147 2448,4172 2503,4172 2527,4148 2799,4148 v1(2864,4213)
PA2: JTAG.5 R20.2 U1.5 | length 1172.8
  Top Layer w8: R20.2 2334.57,3899.57 JTAG.5 2323,3972 2323,4239 v1(2447,4363) ; v1(2644,4178.9) U1.5
  Bottom Layer w8: v1(2447,4363) 2601,4363 2644,4320 v1(2644,4178.9)
PA3: Mini-USB.4 U1.9 | length 1435.6
  Top Layer w8: v1(2750,4106) 2755.84,4100.16 U1.9 ; v1(3419,4440) 3428,4431 3630,4431 3653.5,4454.5 Mini-USB.4
  Bottom Layer w8: v1(2750,4106) 2811.33,4106 2973,4267.67 2973,4414.55 3018,4459.55 3018,4480 3040,4502 3397,4502 3419,4480 v1(3419,4440)
PA4: "SCL MUX/DEMUX.6" "SDA MUX/DEMUX.6" U1.10 | length 3526.8
  Top Layer w8: 2338.54,3235 2288,3235 2271,3218 2271,3129 2333,3067 3417,3067 3417,3109 ; v1(2522,3896) 2522,3972 2523,3973 2523,4041 2530,4048 2635,4048 2666,4079 2775.53,4079 2777,4080.47 U1.10 ; v1(2693,3832) 2693,3649 2934,3408 2934,3150 2975,3109 3417,3109 ; 3403.54,3235 3456,3235 3465,3226 3465,3118 3456,3109 3417,3109
  Bottom Layer w8: v1(2522,3896) 2586,3832 v1(2693,3832)
PA8: P5.3 U1.14 | length 221.4
  Top Layer w8: P5.3 2692,3990 2703.73,4001.73 U1.14
PA9: "SCL MUX/DEMUX.3" R14.1 U1.28 | length 3284.8
  Top Layer w8: v1(2095,3634) 2095,3250 2115,3230 2115.27,3230.27 2200.27,3230.27 2215,3245 2215,3318 2249,3352 R14.1 2291,3380 2296,3385 2338.54,3385 ; U1.28 3093.9,3929.9 3106,3942 v1(3106,4001)
  Bottom Layer w8: v1(2095,3634) 2087.2,3641.8 2087.2,3947.2 2122,3982 2170,3982 2195,4007 2195,4050 2170,4075 2090,4075 2075,4090 2075,4150 2106,4181 2272,4181 2307,4146 2307,3984 2319,3972 2387,3972 2423,3936 2423,3815 2584,3654 2905,3654 2919,3668 2919,3928 2992,4001 v1(3106,4001)
PA10: "SDA MUX/DEMUX.3" R15.1 U1.29 | length 778.6
  Top Layer w8: U1.29 3113.58,3842.18 3104.2,3832.8 3104.2,3792 3115,3781.2 3213.8,3781.2 3265,3730 3265,3380 R15.1 3354,3385 3403.54,3385
PA11: C11.2 U1.30 Y2.2 | length 414.9
  Top Layer w8: v1(3130,3807) 3133.27,3810.27 U1.30
  Bottom Layer w8: v1(3130,3807) 3130,3776.02 Y2.2 3132.17,3671.81 3278.34,3671.81 C11.2
PA12: C12.2 U1.31 Y2.1 | length 281.4
  Top Layer w8: U1.31 3152.95,3854.82 v1(3193.2,3814.56)
  Bottom Layer w8: v1(3193.2,3814.56) 3201.02,3806.74 Y2.1 3236.02,3760 C12.2
PA13: P7.1 U1.33 | length 404.6
  Top Layer w8: U1.33 3243,3962.36 3243,3900.95 3260.55,3883.4 3550,3883.4 P7.1
PA14: 2.4G.6 U1.34 | length 1105.8
  Top Layer w8: U1.34 3324.95,3982.05 3332,3975 v1(3273,3916)
  Bottom Layer w8: v1(3273,3916) 3273,3886 3341,3818 3448.2,3818 3472,3794.2 3664.8,3794.2 3685.33,3773.67 3733,3773.67 3751.33,3792 3751.33,3840 3733.33,3858 3696,3858 3668,3886 3668,3936 3689,3957 3768,3957 2.4G.6
PA15: 2.4G.5 U1.35 | length 1030.5
  Top Layer w8: v1(3187,4001.73) U1.35
  Bottom Layer w8: v1(3187,4001.73) 3187,3896.4 3281.4,3802 3415.8,3802 3509.6,3708.2 3733.26,3708.2 3767.13,3742.07 3767.13,3857.87 2.4G.5
PA16: 2.4G.4 U1.36 | length 1068.9
  Top Layer w8: U1.36 3350,4021.42 3377,3994.42 3377,3922 3397,3902 3591.33,3902 3591.33,3803.33 v1(3556,3768) ; v1(3662,3734) 3693,3734 3767,3808 3767,3972 2.4G.4
  Bottom Layer w8: v1(3556,3768) 3628,3768 v1(3662,3734)
PA17: P7.2 U1.37 | length 384.3
  Top Layer w8: U1.37 3293.1,4041.1 v1(3300,4048)
  Bottom Layer w8: v1(3300,4048) 3326,4022 3450,4022 3465,4037 3509,4037 3550,3996 P7.2
PA18: C9.2 U1.39 Y1.2 | length 308.4
  Top Layer w8: U1.39 3313.5,4080.47 Y1.2
  Bottom Layer w8: C9.2 3376.54,3940.51 Y1.2
PA19: C10.2 U1.40 Y1.1 | length 257.6
  Top Layer w8: U1.40 3328,4100.16 3328.87,4101.02 Y1.1
  Bottom Layer w8: C10.2 3386.54,4129.49 Y1.1
PA20: U1.44 UART.2 | length 540.3
  Top Layer w8: U1.44 3284.9,4178.9 3295,4189 3446,4189 v1(3500,4243)
  Bottom Layer w8: v1(3500,4243) 3500,4276.33 3520,4296.33 3654.33,4296.33 3668,4310 UART.2
PA21: U1.45 UART.1 | length 1031.3
  Top Layer w8: v1(3171,4150) 3171,4161.58 3208,4198.58 U1.45
  Bottom Layer w8: v1(3171,4150) 3253.43,4150 3355.6,4047.83 3452.02,4047.83 3501.19,4097 3587.67,4097 3624.67,4060 3750,4060 3761.17,4071.17 3761.17,4139.17 3810,4188 UART.1
PA22: P7.5 U1.46 | length 341.2
  Top Layer w8: U1.46 3327.85,4218.27 3378.38,4268.8 3525.87,4268.8 3525.87,4255 P7.5
PA23: P7.6 U1.47 | length 355
  Top Layer w8: U1.47 3290.95,4237.95 3408,4355 P7.6
PA24: P8.5 U1.59 | length 138
  Top Layer w8: P8.5 2960,4401.79 2975.79,4386 U1.59
PA25: P8.6 U1.60 | length 189.9
  Top Layer w8: P8.6 2891.73,4460 2941.25,4410.47 2941.25,4391.54 2956.1,4376.69 U1.60
PA26: P8.7 U1.61 | length 273.3
  Top Layer w8: v1(2843,4409) 2852.67,4418.67 2900.13,4418.67 2925.45,4393.35 2925.45,4384.99 2936.42,4374.03 U1.61 U1.61@2934.44,4330.48
  Bottom Layer w8: P8.7 2792,4460 v1(2843,4409)
PA27: P8.8 U1.62 | length 598.6
  Top Layer w8: v1(2892,4255) 2916.73,4279.73 U1.62
  Bottom Layer w8: P8.8 2702,4502 2897,4502 2910.8,4488.2 2910.8,4273.8 v1(2892,4255)
PA28: 2.4G.7 U1.41 | length 790.7
  Top Layer w8: U1.41 3380.49,4119.84 3399.07,4138.42 3441.98,4138.42 3472.87,4107.52 v1(3472.87,4005.56)
  Bottom Layer w8: v1(3472.87,4005.56) 3481,3997.43 3481,3858 3471,3848 3471,3819 3480,3810 3667,3810 3672,3815 2.4G.7
PA29: P7.3 U1.42 | length 353.7
  Top Layer w8: U1.42 3355.04,4139.53 3369.72,4154.22 3450.78,4154.22 P7.3
PA30: P5.4 U1.15 | length 254.6
  Top Layer w8: P5.4 2650.95,3890 2743,3982.05 U1.15
PA31: P5.5 U1.16 | length 287.9
  Top Layer w8: P5.5 2762.36,3962.36 U1.16
PB0: P5.1 U1.6 | length 241.1
  Top Layer w8: P5.1 2635.12,4144.88 2667.13,4144.88 2681.46,4159.21 U1.6
PB1: P5.2 U1.7 | length 237
  Top Layer w8: P5.2 2643.85,4090 2693.38,4139.53 U1.7
PB2: P6.1 U1.24 | length 497.3
  Top Layer w8: U1.24 3015.16,3941.16 v1(3023,3949)
  Bottom Layer w8: P6.1 2947,3667 2947,3873 v1(3023,3949)
PB3: P6.2 U1.25 | length 796.5
  Top Layer w8: U1.25 3034.84,3837.16 v1(3060,3812)
  Bottom Layer w8: P6.2 3044,3496 3168,3496 3202,3530 3202,3620 3168,3654 3067,3654 3041,3680 3041,3793 v1(3060,3812)
PB4: P6.3 U1.26 | length 361
  Top Layer w8: U1.26 3054.53,3855.54 3088.4,3821.66 3088.4,3770.73 3117,3742.13 3117,3637 P6.3
PB5: P6.4 U1.27 | length 698.1
  Top Layer w8: U1.27 3074.21,3962.21 v1(3080,3968)
  Bottom Layer w8: v1(3080,3968) 3018,3906 3018,3548 3040,3526 3106,3526 P6.4
PB6: 2.4G.3 U1.38 | length 870.2
  Top Layer w8: U1.38 3208,4060.79 3161.2,4013.99 3161.2,3976.8 3225.38,3912.62 3225.38,3879.18 3240,3864.56 3468.44,3864.56 v1(3497,3836)
  Bottom Layer w8: v1(3497,3836) 3497,3888 3515.16,3906.16 3601.16,3906.16 2.4G.3
PB7: P7.4 U1.43 | length 317.2
  Top Layer w8: U1.43 3346.01,4159.21 3356.81,4170.02 3483.99,4170.02 3499.01,4155 P7.4
PB8: P8.1 U1.54 | length 428.9
  Top Layer w8: v1(3068,4272) 3074.21,4278.21 U1.54
  Bottom Layer w8: v1(3068,4272) 3196.82,4400.82 3300.82,4400.82 P8.1
PB9: P8.2 U1.55 | length 297.4
  Top Layer w8: U1.55 3054.53,4392.47 v1(3071.06,4409)
  Bottom Layer w8: v1(3071.06,4409) 3173,4409 3224,4460 P8.2
PB10: P8.3 U1.57 | length 372
  Top Layer w8: U1.57 3015.16,4370.16 3035,4390 3035,4415 3010,4440 3010,4505 3020,4515 3105,4515 P8.3
PB11: P8.4 U1.58 | length 158.2
  Top Layer w8: U1.58 2995.47,4395.47 v1(2999,4399)
  Bottom Layer w8: v1(2999,4399) P8.4
RESET_N: "3.3V Power Source.8" R18.2 RESET.1 U1.63 | length 1057
  Top Layer w8: 2435.39,4665 2468,4665 2477,4656 2477,4468 RESET.1 ; R18.2 2664.57,4296 2675.99,4284.58 2731.64,4284.58 2735.22,4281 2888,4281 2897.05,4290.05 U1.63 2897.05,4376.12 v1(2880.3,4392.87)
  Bottom Layer w8: RESET.1 2561.8,4383.2 2870.63,4383.2 v1(2880.3,4392.87)
TWI0: "SCL MUX/DEMUX.5" Accel.7 Gyro.23 MAG.1 R12.2 | length 3104.8
  Top Layer w8: v1(2143.11,4245.59) 2069.07,4171.55 2069.07,3225.93 2090,3205 2230,3205 2250.43,3225.43 R12.2 2338.54,3285 ; v1(2567,4732) 2567,4864 2614,4911 2744,4911 2755.47,4899.53 Gyro.23 ; v1(2903,4708) 2906,4705 MAG.1@2962,4705 ; v1(2962,4782.13) MAG.1@2962,4705 ; MAG.1 MAG.1@2962,4705 ; v1(3079,4782.13) 3079,4811.26 Accel.7
  Bottom Layer w8: v1(2143.11,4245.59) 2544.92,4647.4 ; v1(2567,4732) 2567,4669.48 2544.92,4647.4 ; v1(2903,4708) 2903,4686.4 2864,4647.4 2544.92,4647.4 ; v1(2962,4782.13) v1(3079,4782.13)
TWI0_0: "SCL MUX/DEMUX.13" FB_TWIs.1 R3.2 | length 650.8
  Top Layer w8: FB_TWIs.1 2454,3521 2454,3360 2479,3335 2531.46,3335 2570,3335 2590,3315 R3.2
TWI0_1: "SDA MUX/DEMUX.13" FB_TWIs.2 R4.2 | length 2228.2
  Top Layer w8: v1(3526,3366) 3557,3335 3596.46,3335 3645,3335 3670,3310 R4.2
  Bottom Layer w8: FB_TWIs.2 2145,3230 2175,3200 2314,3200 2315,3199 2536,3199 2589.57,3145.43 2643,3145.43 2665.57,3168 2665.57,3174.91 2856.66,3366 v1(3526,3366)
TWI1: "SDA MUX/DEMUX.5" Accel.9 Gyro.24 MAG.16 R13.2 | length 3843.2
  Top Layer w8: v1(2674,4709) 2674,4864 2686,4876 2735.79,4876 Gyro.24 ; MAG.16 2985.67,4751.34 v1(2988,4753.67) v1@2988.33,4754 ; Accel.9 v1(3143,4850.63) ; R13.2 3403.54,3285 3471,3285 3483.84,3297.84 3483.84,3530.84 v1(3524,3571)
  Bottom Layer w8: v1(2674,4709) 2867,4709 2911.67,4753.67 v1(2988,4753.67) 3016.67,4725 3055,4725 3072.2,4707.8 3072.2,4657.8 3090,4640 3137,4640 3291,4794 3810,4794 3868,4736 3868,3680 3759,3571 v1(3524,3571) ; v1@2988.33,4754 3104,4754 3143,4793 v1(3143,4850.63)
TWI1_0: "SCL MUX/DEMUX.14" FB_TWIs.3 R5.2 | length 1187.1
  Top Layer w8: 2531.46,3385 R5.2 2665,3376 2665,3205 2650,3190 v1(2621,3190)
  Bottom Layer w8: FB_TWIs.3 2305.61,3830 2621,3514.61 v1(2621,3190)
TWI1_1: "SDA MUX/DEMUX.14" FB_TWIs.4 R6.2 | length 2683.4
  Top Layer w8: 3596.46,3385 v1(3672,3385) R6.2
  Bottom Layer w8: FB_TWIs.4 2145,3797 2187,3755 2187,3354 2223,3318 2442,3318 2596,3164 2635,3164 2647,3176 2647,3205 2645,3207 2645,3390 2663,3408 3530,3408 3632,3510 3725,3510 3740,3495 3740,3420 3705,3385 v1(3672,3385)
TWI2_0: "SCL MUX/DEMUX.15" FB_TWIs.5 R2.2 | length 840
  Top Layer w8: v1(2480,3521) 2470,3511 2470,3445 2531.46,3435 2570,3435 2590,3455 R2.2
  Bottom Layer w8: FB_TWIs.5 2203.67,3888.67 2203.67,3801.54 2216.54,3788.67 2303,3788.67 2480,3611.67 v1(2480,3521)
TWI2_1: "SDA MUX/DEMUX.15" FB_TWIs.6 R7.2 | length 2711.2
  Top Layer w8: 3596.46,3435 3648,3435 v1(3661,3455) R7.2
  Bottom Layer w8: FB_TWIs.6 2103,3888 2103,3665.8 2120.8,3648 2120.8,3200 2137.6,3183.2 2491.8,3183.2 2546.84,3128.16 2659,3128.16 2684.71,3153.87 3473.87,3153.87 3530,3210 3575,3210 3600,3235 3600,3435 3620,3455 v1(3661,3455)
TWI3_0: "SCL MUX/DEMUX.12" FB_TWIs.7 R8.2 | length 1116.2
  Top Layer w8: v1(2410,3470) 2436,3444 2436,3312 2463,3285 2531.46,3285 2560,3285 2600,3245 R8.2
  Bottom Layer w8: FB_TWIs.7 2187.87,3972.87 2187.87,3795 2210,3772.87 2296.13,3772.87 2410,3659 v1(2410,3470)
TWI3_1: "SDA MUX/DEMUX.12" FB_TWIs.8 R9.2 | length 2754
  Top Layer w8: 3596.46,3285 3633,3285 3688,3235 ; v1(3680,3191) 3680,3227 3688,3235 ; R9.2 3688,3235
  Bottom Layer w8: FB_TWIs.8 2069.07,3954.07 2069.07,3187.93 2114.2,3142.8 2497.84,3142.8 2547.44,3093.2 3582.2,3093.2 v1(3680,3191)
TWI4_0: "SCL MUX/DEMUX.1" FB_TWIs.9 R10.2 | length 831.7
  Top Layer w8: FB_TWIs.9 2287,4088 2287,3808 2250.33,3771.33 2203.67,3771.33 2203.67,3694.76 2250.43,3648 R10.2 2338.54,3485
TWI4_1: "SDA MUX/DEMUX.1" FB_TWIs.10 R11.2 | length 1708.7
  Top Layer w8: v1(3291,3543) 3300.43,3533.57 R11.2 3403.54,3485
  Bottom Layer w8: FB_TWIs.10 2187,4088 2263,4088 2287,4064 2287,3895 2706,3476 3224,3476 v1(3291,3543)
USBDM: Mini-USB.2 R17.1 | length 356.1
  Top Layer w8: v1(3670,4710) 3701.5,4710 3716.5,4695 Mini-USB.2
  Bottom Layer w8: R17.1 3545,4740 3575,4770 3635,4770 3670,4735 v1(3670,4710)
USBDP: Mini-USB.3 R16.1 | length 528.4
  Top Layer w8: Mini-USB.3 3685,4651.25 3668.23,4668.02 3656.98,4668.02 3640,4685 3640,4750 3660,4770 3700,4770 v1(3705,4765)
  Bottom Layer w8: v1(3705,4765) 3810,4765 3835,4740 3835,4669.57 R16.1
VBUS: C14.1 C15.1 Ferrite.2 U1.52 | length 1068.2
  Top Layer w8: U1.52 3113.58,4368 3145.93,4400.35 3168.35,4400.35 3201.33,4433.33 v1(3201.33,4545)
  Bottom Layer w8: v1(3201.33,4545) 3228.13,4518.2 3301.8,4518.2 3328.6,4545 C14.1 ; C15.1 C14.1 ; Ferrite.2 3794.53,4540 3715,4540 3620.8,4634.2 3524.74,4634.2 3466.54,4576 C14.1
VIN: "3.3V Power Source.3" "3.3V Power Source.4" Battery.2 C2.2 | length 259.3
  Top Layer w20: C2.2 2130,4443.46 Battery.2 2177,4525 2187,4515 2234.61,4515 2234.61,4565
pads on no net: Accel.1 Accel.6 Accel.11 Accel.12 Gyro.1 Gyro.2 Gyro.3 Gyro.4 Gyro.5 Gyro.14 Gyro.15 Gyro.16 Gyro.17 Gyro.19 Gyro.21 Gyro.22 MAG.3 MAG.5 MAG.6 MAG.7 MAG.14 Mini-USB.NC
copper on no net:
  other v2: 3598.39,4713.31 3771.61,4713.31

## Polygon pours and split planes (outlines as drawn)
GND on Bottom Layer "Bottom Layer-No Net" (solid, shelved, pour order 6): 2025,4975 3975,4975 3975,3025 2025,3025
GND on Top Layer "Top Layer-GND" (solid, shelved, pour order 8): 2025,4975 3975,4975 3975,3025 2025,3025

## Keep-outs
Keep-Out Layer:
  lines w10: 2050,3050 2050,4950 3950,4950 3950,3050 2050,3050

## Silkscreen, mask and mechanical layers (free items; w line width, h text height)
Bottom Overlay:
  text "3D Mouse Main Board rev 0.3" at 3930,3190 h60
  text "Designed by Jianer Shi and Borui Chen" at 3930,3135 h60
  text "10/25/2011" at 3930,3070 h60
Drill Drawing:
  text ".LEGEND" at 3510,2855 h60

## Dimensions
2050,3050 to 2050,4950 on Mechanical 1
2050,3050 to 3950,3050 on Mechanical 1

## Text inside footprints (layer, text, board x,y; h text height)
2.4G: Top Overlay "2" at 3790,4215 h50 r270; Top Overlay "1" at 3690,4195 h50 r270; Top Overlay "7" at 3690,3755 h50 r270; Top Overlay "8" at 3790,3755 h50 r270
FB_TWIs: Top Overlay "10" at 2165,4190 h50 r90; Top Overlay "9" at 2265,4190 h50 r90; Top Overlay "1" at 2265,3650 h50 r90; Top Overlay "2" at 2165,3630 h50 r90
JTAG: Top Overlay "6" at 2445,3870 h50 r270; Top Overlay "5" at 2345,3870 h50 r270; Top Overlay "2" at 2445,4230 h50 r270; Top Overlay "1" at 2345,4210 h50 r270